# EAGLE board purchase_2021-01-21 (EAGLE 9.6.2)
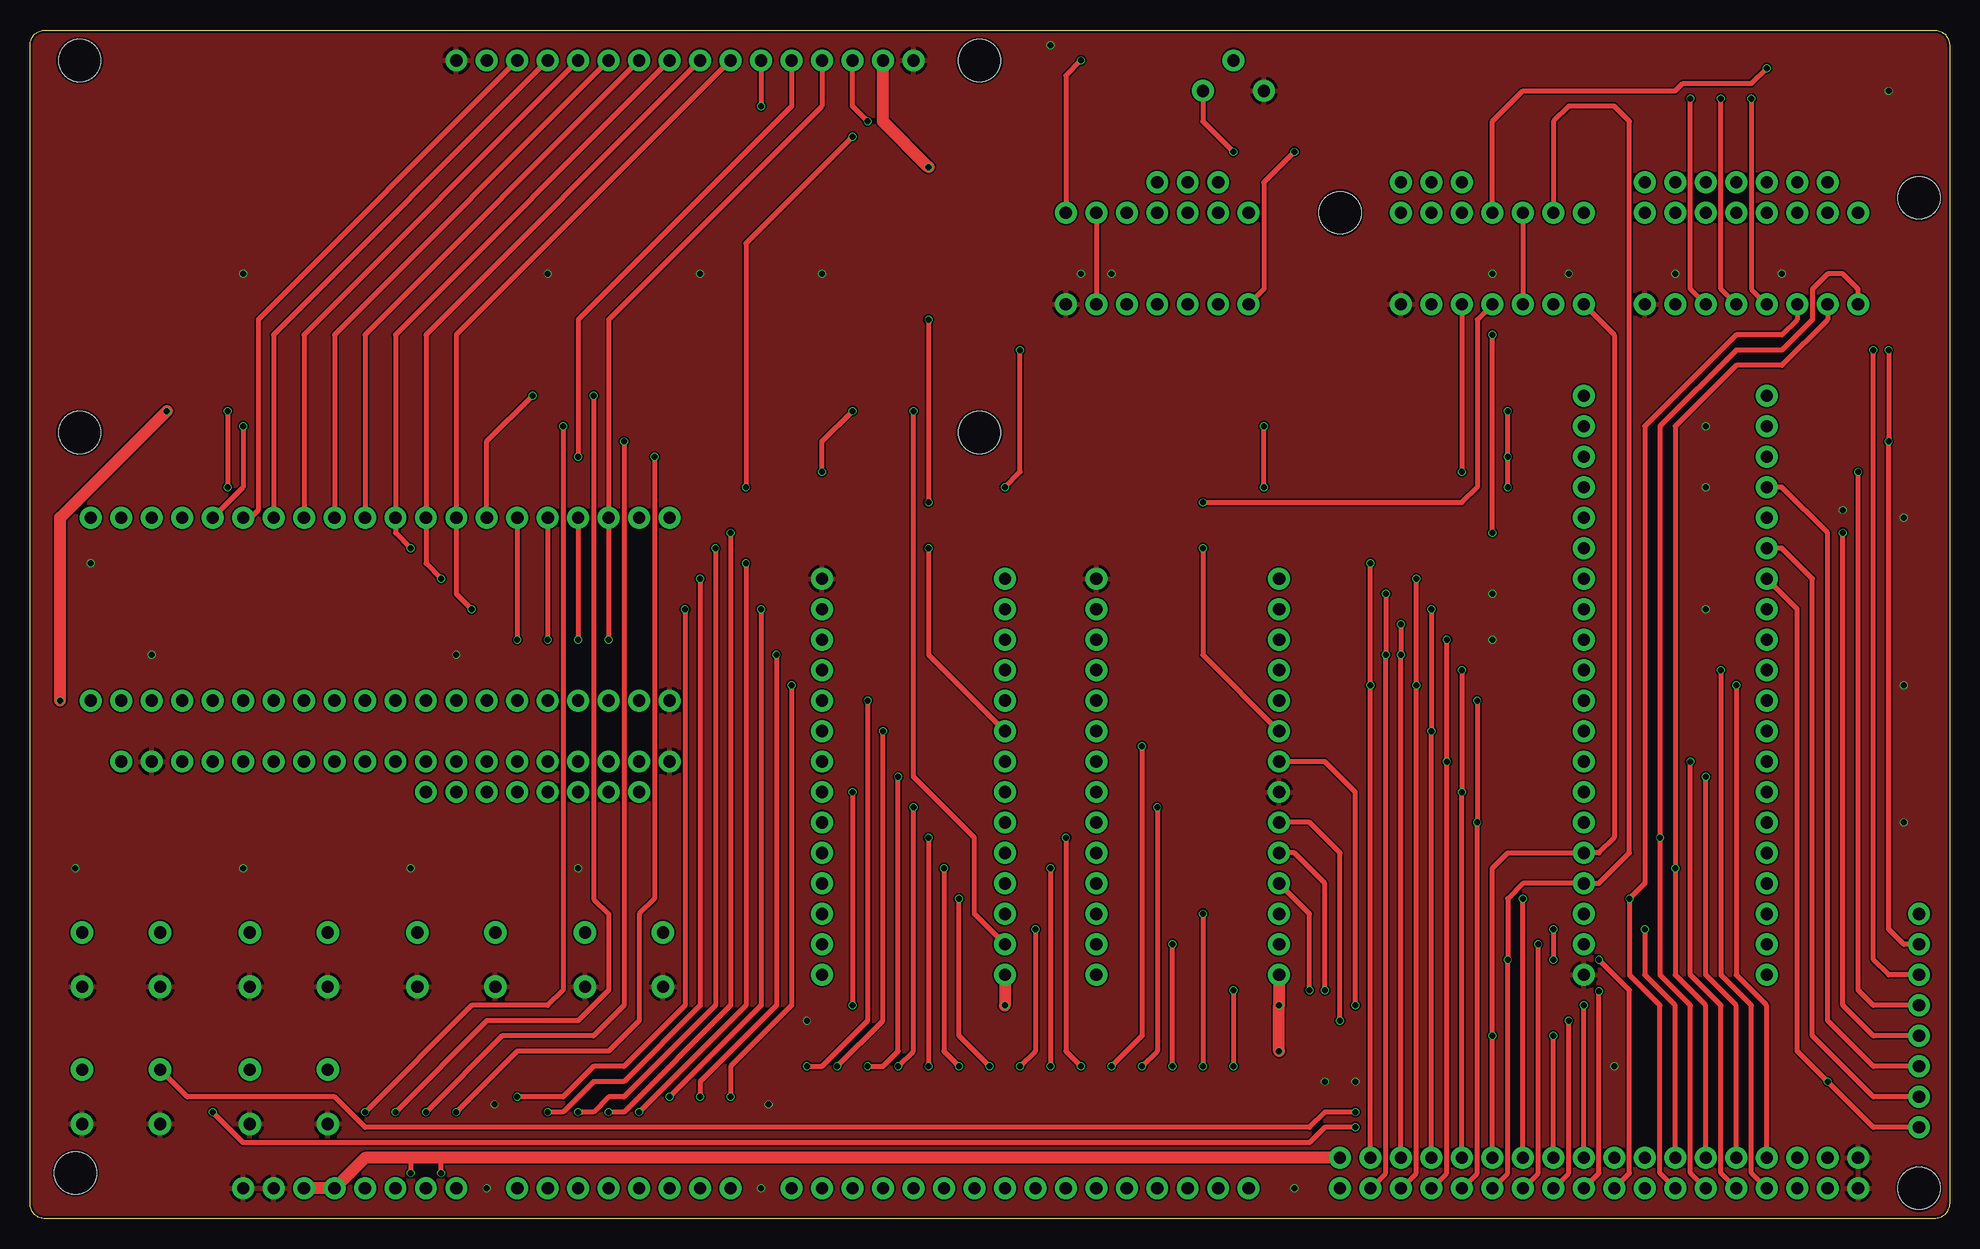
[diagram p0: board, top side]
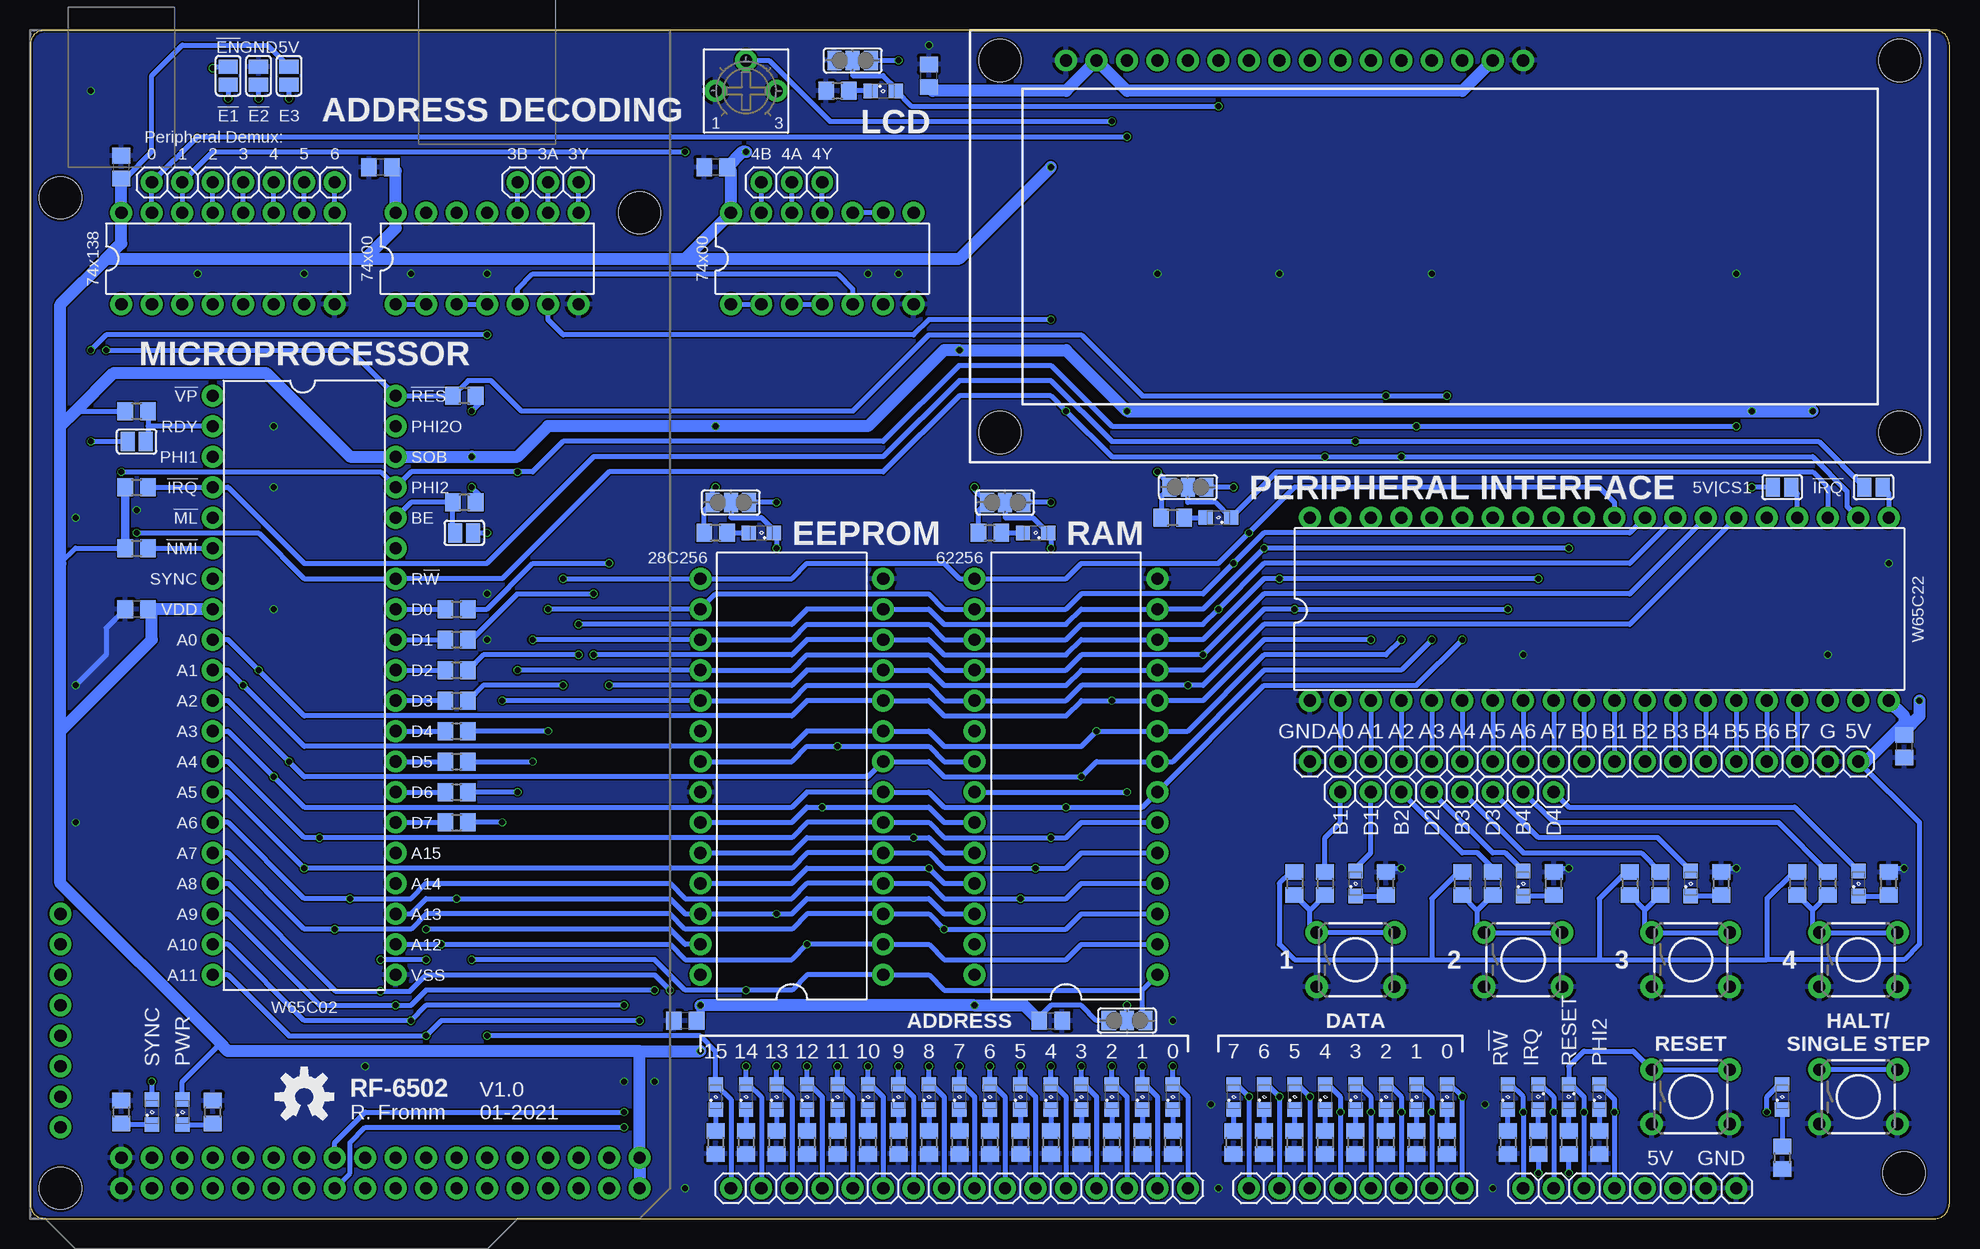
[diagram p1: board, bottom side, seen from below]

Size 160 x 99.06 mm. Coordinates in mm from the lower left corner, seen from the top.
Outline: 0,1.27 0,97.79 arc-90 1.27,99.06 158.73,99.06 arc-90 160,97.79 160,1.27 arc-90 158.73,0 1.27,0 arc-90 0,1.27
Copper layers (1*16): Top 0.035mm / dielectric 1.6mm / Bottom 0.035mm
Design rules "jlcpcb-2layers *": minimum track width 5mil, minimum drill 0.3mm, track to track 5mil, track to pad 5mil, pad to pad 5mil, via to via 5mil, smd to smd 5mil, copper to edge 0.2mm, drill to drill 6mil, minimum pad ring 10mil, minimum via ring 3mil, stop-mask expansion 4mil, vias tented up to drill 0.5mm, thermal gap 10mil
Holes 3.5 mm at 3.79,3.81

## Footprints (pad centres in the part's own frame; a part is rotated, then mirrored left to right if it is on the bottom)
C0805 = smd 1.3 x 1.5: 1 -0.95,0; 2 0.95,0
SJ = smd 1.168 x 1.6: 1 -0.762,0; 2 0.762,0
SML0805 = smd 1.2 x 1.2: A 1.05,0; C -1.05,0
ARDUINO_MEGA_PINS = drill 1.016 pad 1.778: 5V@1 44.45,24.13; 5V@2 46.99,24.13; 22 44.45,21.59; 23 46.99,21.59; 24 44.45,19.05; 25 46.99,19.05; 26 44.45,16.51; 27 46.99,16.51; 28 44.45,13.97; 29 46.99,13.97; 30 44.45,11.43; 31 46.99,11.43; 32 44.45,8.89; 33 46.99,8.89; 34 44.45,6.35; 35 46.99,6.35; 36 44.45,3.81; 37 46.99,3.81; 38 44.45,1.27; 39 46.99,1.27; 40 44.45,-1.27; 41 46.99,-1.27; 42 44.45,-3.81; 43 46.99,-3.81; 44 44.45,-6.35; 45 46.99,-6.35; 46 44.45,-8.89; 47 46.99,-8.89; 48 44.45,-11.43; 49 46.99,-11.43; 50 44.45,-13.97; 51 46.99,-13.97; 52 44.45,-16.51; 53 46.99,-16.51; A8 24.13,-24.13; A9 26.67,-24.13; A10 29.21,-24.13; A11 31.75,-24.13; A12 34.29,-24.13; A13 36.83,-24.13; A14 39.37,-24.13; A15 41.91,-24.13; GND@2 44.45,-19.05; GND@3 46.99,-19.05 | hole 3.5: -34.29,24.13; -35.56,-24.13; 46.99,-24.13
LCD-16X2 = drill 1.016 pad 1.778: 1 0,0; 2 2.54,0; 3 5.08,0; 4 7.62,0; 5 10.16,0; 6 12.7,0; 7 15.24,0; 8 17.78,0; 9 20.32,0; 10 22.86,0; 11 25.4,0; 12 27.94,0; 13 30.48,0; 14 33.02,0; 15 35.56,0; 16 38.1,0 | hole 3.5: -5.5,0; -5.5,-31; 69.5,0; 69.5,-31
R0805 = smd 1.3 x 1.5: 1 -0.95,0; 2 0.95,0
3362P = drill 1.016 pad 1.778: 1 -2.54,0; 2 0,2.54; 3 2.54,0
SJ_2 = smd 1.168 x 1.6: 1 -1.524,0; 2 0,0; 3 1.524,0
DIL40 = drill 1.016 pad 1.778: 1 -24.13,-7.62; 2 -21.59,-7.62; 3 -19.05,-7.62; 4 -16.51,-7.62; 5 -13.97,-7.62; 6 -11.43,-7.62; 7 -8.89,-7.62; 8 -6.35,-7.62; 9 -3.81,-7.62; 10 -1.27,-7.62; 11 1.27,-7.62; 12 3.81,-7.62; 13 6.35,-7.62; 14 8.89,-7.62; 15 11.43,-7.62; 16 13.97,-7.62; 17 16.51,-7.62; 18 19.05,-7.62; 19 21.59,-7.62; 20 24.13,-7.62; 21 24.13,7.62; 22 21.59,7.62; 23 19.05,7.62; 24 16.51,7.62; 25 13.97,7.62; 26 11.43,7.62; 27 8.89,7.62; 28 6.35,7.62; 29 3.81,7.62; 30 1.27,7.62; 31 -1.27,7.62; 32 -3.81,7.62; 33 -6.35,7.62; 34 -8.89,7.62; 35 -11.43,7.62; 36 -13.97,7.62; 37 -16.51,7.62; 38 -19.05,7.62; 39 -21.59,7.62; 40 -24.13,7.62
DIL28-6 = drill 1.016 pad 1.778: 1 -16.51,-7.62; 2 -13.97,-7.62; 3 -11.43,-7.62; 4 -8.89,-7.62; 5 -6.35,-7.62; 6 -3.81,-7.62; 7 -1.27,-7.62; 8 1.27,-7.62; 9 3.81,-7.62; 10 6.35,-7.62; 11 8.89,-7.62; 12 11.43,-7.62; 13 13.97,-7.62; 14 16.51,-7.62; 15 16.51,7.62; 16 13.97,7.62; 17 11.43,7.62; 18 8.89,7.62; 19 6.35,7.62; 20 3.81,7.62; 21 1.27,7.62; 22 -1.27,7.62; 23 -3.81,7.62; 24 -6.35,7.62; 25 -8.89,7.62; 26 -11.43,7.62; 27 -13.97,7.62; 28 -16.51,7.62
DIL14 = drill 1.016 pad 1.778: 1 -7.62,-3.81; 2 -5.08,-3.81; 3 -2.54,-3.81; 4 0,-3.81; 5 2.54,-3.81; 6 5.08,-3.81; 7 7.62,-3.81; 8 7.62,3.81; 9 5.08,3.81; 10 2.54,3.81; 11 0,3.81; 12 -2.54,3.81; 13 -5.08,3.81; 14 -7.62,3.81
DIL16 = drill 1.016 pad 1.778: 1 -8.89,-3.81; 2 -6.35,-3.81; 3 -3.81,-3.81; 4 -1.27,-3.81; 5 1.27,-3.81; 6 3.81,-3.81; 7 6.35,-3.81; 8 8.89,-3.81; 9 8.89,3.81; 10 6.35,3.81; 11 3.81,3.81; 12 1.27,3.81; 13 -1.27,3.81; 14 -3.81,3.81; 15 -6.35,3.81; 16 -8.89,3.81
1X08 = drill 1.016 pad 1.778: 1 -8.89,0; 2 -6.35,0; 3 -3.81,0; 4 -1.27,0; 5 1.27,0; 6 3.81,0; 7 6.35,0; 8 8.89,0
1X07 = drill 1.016 pad 1.778: 1 -7.62,0; 2 -5.08,0; 3 -2.54,0; 4 0,0; 5 2.54,0; 6 5.08,0; 7 7.62,0
1X03 = drill 1.016 pad 1.778: 1 -2.54,0; 2 0,0; 3 2.54,0
TACTILE_SWITCH_PTH_6.0MM = drill 1.016 pad 1.88: 1 -3.251,2.261; 2 3.251,2.261; 3 -3.251,-2.261; 4 3.251,-2.261
1X10 = drill 1.016 pad 1.778: 1 -11.43,0; 2 -8.89,0; 3 -6.35,0; 4 -3.81,0; 5 -1.27,0; 6 1.27,0; 7 3.81,0; 8 6.35,0; 9 8.89,0; 10 11.43,0
1X09 = drill 1.016 pad 1.778: 1 -10.16,0; 2 -7.62,0; 3 -5.08,0; 4 -2.54,0; 5 0,0; 6 2.54,0; 7 5.08,0; 8 7.62,0; 9 10.16,0

## Placement (x,y rotation side)
C1  100n  [C0805]  151.11,50.8 180 bottom
C2  100n  [C0805]  105.39,16.51 180 bottom
C3  100n  [C0805]  74.91,16.51 0 bottom
C4  100n  [C0805]  3.79,39.37 270 bottom
C5  100n  [C0805]  85.07,95.25 90 bottom
C6  100n  [C0805]  130.79,87.63 180 bottom
C7  100n  [C0805]  102.85,87.63 180 bottom
C8  100n  [C0805]  152.38,87.63 90 bottom
JP1  [SJ]  151.11,64.77 0 bottom
JP2  [SJ]  123.81,57.15 180 bottom
JP3  [SJ]  6.33,60.96 180 bottom
JP4  [SJ]  138.41,95.25 270 bottom
JP5  [SJ]  143.49,95.25 270 bottom
JP6  [SJ]  140.95,95.25 270 bottom
JP7  [SJ]  13.95,60.96 180 bottom
LED1  [SML0805]  64.75,10.16 90 bottom
LED2  [SML0805]  67.29,10.16 90 bottom
LED3  [SML0805]  69.83,10.16 90 bottom
LED4  [SML0805]  72.37,10.16 90 bottom
LED5  [SML0805]  74.91,10.16 90 bottom
LED6  [SML0805]  77.45,10.16 90 bottom
LED7  [SML0805]  79.99,10.16 90 bottom
LED8  [SML0805]  82.53,10.16 90 bottom
LED9  [SML0805]  85.07,10.16 90 bottom
LED10  [SML0805]  87.61,10.16 90 bottom
LED11  [SML0805]  90.15,10.16 90 bottom
LED12  [SML0805]  92.69,10.16 90 bottom
LED13  [SML0805]  95.23,10.16 90 bottom
LED14  [SML0805]  97.77,10.16 90 bottom
LED15  [SML0805]  100.31,10.16 90 bottom
LED16  [SML0805]  102.85,10.16 90 bottom
LED17  [SML0805]  41.89,10.16 90 bottom
LED18  [SML0805]  44.43,10.16 90 bottom
LED19  [SML0805]  46.97,10.16 90 bottom
LED20  [SML0805]  49.51,10.16 90 bottom
LED21  [SML0805]  52.05,10.16 90 bottom
LED22  [SML0805]  54.59,10.16 90 bottom
LED23  [SML0805]  57.13,10.16 90 bottom
LED24  [SML0805]  59.67,10.16 90 bottom
LED25  [SML0805]  36.81,10.16 90 bottom
LED26  [SML0805]  149.84,8.89 90 bottom
LED27  [SML0805]  34.27,10.16 270 bottom
LED28  [SML0805]  99.04,57.15 180 bottom
LED29  [SML0805]  76.18,57.15 180 bottom
LED30  [SML0805]  60.94,58.42 180 bottom
LED31  [SML0805]  88.88,93.98 0 bottom
LED32  [SML0805]  31.73,10.16 270 bottom
LED33  [SML0805]  29.19,10.16 90 bottom
LED34  [SML0805]  13.95,10.16 90 bottom
LED35  [SML0805]  49.51,27.94 90 bottom
LED36  [SML0805]  35.54,27.94 90 bottom
LED37  [SML0805]  21.57,27.94 90 bottom
LED38  [SML0805]  7.6,27.94 90 bottom
LED39  [SML0805]  147.3,8.89 90 bottom
LOGO1  OSHW-LOGOM  [OSHW-LOGO-M]  137.14,10.16 0 bottom
M1  ARDUINO_MEGA_PINS  [ARDUINO_MEGA_PINS]  133.33,49.53 270 bottom
M2  LCD-16X2  [LCD-16X2]  73.64,96.52 0 bottom
R1  10k  [R0805]  151.11,67.31 0 bottom
R2  10k  [R0805]  151.11,60.96 0 bottom
R3  10k  [R0805]  151.11,55.88 0 bottom
R4  10k  [R0805]  123.81,68.58 180 bottom
R5  10k  [R0805]  123.81,59.69 180 bottom
R6  1k  [R0805]  124.44,50.8 0 bottom
R7  1k  [R0805]  124.44,48.26 0 bottom
R8  1k  [R0805]  124.44,45.72 0 bottom
R9  1k  [R0805]  124.44,43.18 0 bottom
R10  1k  [R0805]  124.44,40.64 0 bottom
R11  1k  [R0805]  124.44,38.1 0 bottom
R12  1k  [R0805]  124.44,35.56 0 bottom
R13  1k  [R0805]  124.44,33.02 0 bottom
R14  1k  [R0805]  102.85,57.15 180 bottom
R15  1k  [R0805]  79.99,57.15 180 bottom
R16  1k  [R0805]  64.75,58.42 180 bottom
R17  1k  [R0805]  92.69,93.98 180 bottom
R18  1k  [R0805]  31.73,6.35 270 bottom
R19  1k  [R0805]  29.19,6.35 270 bottom
R20  1k  [R0805]  13.95,5.08 270 bottom
R21  1k  [R0805]  64.75,6.35 270 bottom
R22  1k  [R0805]  67.29,6.35 270 bottom
R23  1k  [R0805]  69.83,6.35 270 bottom
R24  1k  [R0805]  72.37,6.35 270 bottom
R25  1k  [R0805]  74.91,6.35 270 bottom
R26  1k  [R0805]  77.45,6.35 270 bottom
R27  1k  [R0805]  79.99,6.35 270 bottom
R28  1k  [R0805]  82.53,6.35 270 bottom
R29  1k  [R0805]  85.07,6.35 270 bottom
R30  1k  [R0805]  87.61,6.35 270 bottom
R31  1k  [R0805]  90.15,6.35 270 bottom
R32  1k  [R0805]  92.69,6.35 270 bottom
R33  1k  [R0805]  95.23,6.35 270 bottom
R34  1k  [R0805]  97.77,6.35 270 bottom
R35  1k  [R0805]  100.31,6.35 270 bottom
R36  1k  [R0805]  102.85,6.35 270 bottom
R37  1k  [R0805]  41.89,6.35 270 bottom
R38  1k  [R0805]  44.43,6.35 270 bottom
R39  1k  [R0805]  46.97,6.35 270 bottom
R40  1k  [R0805]  49.51,6.35 270 bottom
R41  1k  [R0805]  52.05,6.35 270 bottom
R42  1k  [R0805]  54.59,6.35 270 bottom
R43  1k  [R0805]  57.13,6.35 270 bottom
R44  1k  [R0805]  59.67,6.35 270 bottom
R45  1k  [R0805]  36.81,6.35 270 bottom
R46  1k  [R0805]  152.38,8.89 90 bottom
R47  1k  [R0805]  34.27,6.35 270 bottom
R48  10k  [R0805]  54.59,27.94 270 bottom
R49  10k  [R0805]  40.62,27.94 270 bottom
R50  1k  [R0805]  38.08,27.94 270 bottom
R51  1k  [R0805]  33,27.94 90 bottom
R52  1k  [R0805]  52.05,27.94 270 bottom
R53  1k  [R0805]  46.97,27.94 90 bottom
R54  10k  [R0805]  26.65,27.94 270 bottom
R55  1k  [R0805]  24.11,27.94 270 bottom
R56  1k  [R0805]  19.03,27.94 90 bottom
R57  10k  [R0805]  12.68,27.94 270 bottom
R58  1k  [R0805]  10.14,27.94 270 bottom
R59  1k  [R0805]  5.06,27.94 90 bottom
R60  1k  [R0805]  144.76,8.89 90 bottom
R61  [3362P]  100.31,93.98 0 bottom
SJ1  [SJ_2]  68.56,16.51 180 bottom
SJ2  [SJ_2]  101.58,59.69 0 bottom
SJ3  [SJ_2]  63.48,60.96 0 bottom
SJ4  [SJ_2]  78.72,59.69 0 bottom
SJ7  [SJ_2]  91.42,96.52 0 bottom
U1  W65C02S6TP  [DIL40]  137.14,44.45 270 bottom
U2  28C256  [DIL28-6]  96.5,36.83 90 bottom
U3  62256  [DIL28-6]  73.64,36.83 90 bottom
U4  W65C22S6TP  [DIL40]  29.19,50.8 0 bottom
U5  74HC00N  [DIL14]  121.9,80.01 0 bottom
U6  74138N  [DIL16]  143.49,80.01 0 bottom
U7  74HC00N  [DIL14]  93.96,80.01 0 bottom
X1  [1X08]  72.37,2.54 180 bottom
X3  [1X07]  142.22,86.36 0 bottom
X4  [1X03]  96.5,86.36 180 bottom
X5  [1X08]  26.65,2.54 0 bottom
X6  TACT_SWITCH  [TACTILE_SWITCH_PTH_6.0MM]  21.57,10.16 0 bottom
X7  TACT_SWITCH  [TACTILE_SWITCH_PTH_6.0MM]  7.6,10.16 0 bottom
X8  [1X10]  19.03,38.1 0 bottom
X9  [1X08]  92.69,2.54 180 bottom
X10  [1X08]  49.51,2.54 180 bottom
X11  [1X09]  43.16,38.1 0 bottom
X12  [1X08]  41.89,35.56 180 bottom
X13  TACT_SWITCH  [TACTILE_SWITCH_PTH_6.0MM]  49.51,21.59 0 bottom
X14  TACT_SWITCH  [TACTILE_SWITCH_PTH_6.0MM]  35.54,21.59 0 bottom
X15  TACT_SWITCH  [TACTILE_SWITCH_PTH_6.0MM]  21.57,21.59 0 bottom
X16  TACT_SWITCH  [TACTILE_SWITCH_PTH_6.0MM]  7.6,21.59 0 bottom
X17  [1X03]  116.82,86.36 0 bottom

## Library data of the parts
C1-C8 = rcl; SPICEPREFIX: C
JP1-JP7 M1 M2 R61 SJ1-SJ4 SJ7 U1-U7 X1 X3-X17 = 6502_lib
LED1-LED39 = led
LOGO1 = SparkFun-Aesthetics
R1-R60 = rcl; SPICEPREFIX: R

## Nets
+5V: C1.1 C2.1 C3.1 C4.1 C5.1 C6.1 C7.1 C8.1 JP4.1 JP7.2 LED39.A M1.5V@1 M1.5V@2 M2.2 M2.15 R1.1 R2.1 R3.1 R4.1 R5.1 R14.2 R15.2 R16.2 R18.2 R47.2 R48.1 R49.1 R54.1 R57.1 R61.3 SJ1.3 SJ2.1 SJ3.1 SJ4.1 U1.8 U1.38 U2.28 U3.28 U4.20 U5.14 U6.16 U7.14 X5.5 X5.6 X8.10
A0: LED1.A M1.49 M2.4 U1.9 U2.10 U3.10 U4.38 X1.1
A1: LED2.A M1.48 U1.10 U2.9 U3.9 U4.37 X1.2
A2: LED3.A M1.47 U1.11 U2.8 U3.8 U4.36 X1.3
A3: LED4.A M1.46 U1.12 U2.7 U3.7 U4.35 X1.4
A4: LED5.A M1.45 U1.13 U2.6 U3.6 U6.1 X1.5
A5: LED6.A M1.44 U1.14 U2.5 U3.5 U6.2 X1.6
A6: LED7.A M1.43 U1.15 U2.4 U3.4 U6.3 X1.7
A7: LED8.A M1.42 U1.16 U2.3 U3.3 X1.8
A8: LED9.A M1.37 U1.17 U2.25 U3.25 X9.1
A9: LED10.A M1.36 U1.18 U2.24 U3.24 X9.2
A10: LED11.A M1.35 U1.19 U2.21 U3.21 X9.3
A11: LED12.A M1.34 U1.20 U2.23 U3.23 X9.4
A12: LED13.A M1.33 U1.22 U2.2 U3.2 X9.5
A13: LED14.A M1.32 U1.23 U2.26 U3.26 X9.6
A14: LED15.A M1.31 SJ1.1 U1.24 U2.1 U3.1 U5.13 X9.7
A15: LED16.A M1.30 U1.25 U5.1 U5.2 X9.8
BE: JP2.2 R5.2 U1.36
BTN1: R52.1 X12.8
BTN2: R50.1 X12.6
BTN3: R55.1 X12.4
BTN4: R58.1 X12.2
D0: LED17.A M1.22 M2.7 R6.2 U2.11 U3.11 U4.33 X10.1
D1: LED18.A M1.23 M2.8 R7.2 U2.12 U3.12 U4.32 X10.2
D2: LED19.A M1.24 M2.9 R8.2 U2.13 U3.13 U4.31 X10.3
D3: LED20.A M1.25 M2.10 R9.2 U2.15 U3.15 U4.30 X10.4
D4: LED21.A M1.26 M2.11 R10.2 U2.16 U3.16 U4.29 X10.5
D5: LED22.A M1.27 M2.12 R11.2 U2.17 U3.17 U4.28 X10.6
D6: LED23.A M1.28 M2.13 R12.2 U2.18 U3.18 U4.27 X10.7
D7: LED24.A M1.29 M2.14 R13.2 U2.19 U3.19 U4.26 X10.8
EEPROM_!CS: LED28.C SJ2.2 U2.20
EEPROM_!WE: M1.39 U2.27
GND: C1.2 C2.2 C3.2 C4.2 C5.2 C6.2 C7.2 C8.2 JP6.1 M1.GND@2 M1.GND@3 M2.1 M2.16 R17.2 R19.2 R20.2 R21.2 R22.2 R23.2 R24.2 R25.2 R26.2 R27.2 R28.2 R29.2 R30.2 R31.2 R32.2 R33.2 R34.2 R35.2 R36.2 R37.2 R38.2 R39.2 R40.2 R41.2 R42.2 R43.2 R44.2 R45.2 R46.2 R51.2 R53.2 R56.2 R59.2 R60.2 R61.1 SJ7.1 U1.21 U2.14 U2.22 U3.14 U4.1 U5.7 U6.8 U7.7 X5.7 X5.8 X6.3 X6.4 X7.3 X7.4 X8.9 X11.1 X13.3 X13.4 X14.3 X14.4 X15.3 X15.4 X16.3 X16.4
HALT_BTN: M1.40 X7.1 X7.2
HALT_LED: LED34.A M1.41
IRQB: JP3.2 LED27.C M1.A13 R2.2 U1.4 X5.2
LCD_CS: LED31.A M2.6 SJ7.2
N$1: R6.1 U1.33
N$2: R7.1 U1.32
N$3: R8.1 U1.31
N$4: R9.1 U1.30
N$5: R10.1 U1.29
N$6: R11.1 U1.28
N$7: R12.1 U1.27
N$8: R13.1 U1.26
N$9: U5.8 X17.3
N$10: U5.9 X17.2
N$11: SJ1.2 U3.22
N$12: SJ2.3 U5.3 U5.4 U5.12
N$13: SJ4.3 U5.6
N$14: SJ3.3 U6.15 X3.1
N$15: JP4.2 U6.6
N$16: JP5.1 U5.11
N$17: JP6.2 U6.5
N$18: U6.14 U7.1 U7.2 X3.2
N$19: U7.3 U7.4
N$20: U7.6 U7.9 U7.10
N$21: SJ7.3 U7.8
N$22: LED1.C R21.1
N$23: LED2.C R22.1
N$24: LED3.C R23.1
N$25: LED4.C R24.1
N$26: LED5.C R25.1
N$27: LED6.C R26.1
N$28: LED7.C R27.1
N$29: LED8.C R28.1
N$30: LED9.C R29.1
N$31: LED10.C R30.1
N$32: LED11.C R31.1
N$33: LED12.C R32.1
N$34: LED13.C R33.1
N$35: LED14.C R34.1
N$36: LED15.C R35.1
N$37: LED16.C R36.1
N$38: LED17.C R37.1
N$39: LED18.C R38.1
N$40: LED19.C R39.1
N$41: LED20.C R40.1
N$42: LED21.C R41.1
N$43: LED22.C R42.1
N$44: LED23.C R43.1
N$45: LED24.C R44.1
N$46: LED25.C R45.1
N$47: LED26.C R46.1
N$48: LED27.A R47.1
N$49: LED28.A R14.1
N$50: LED29.A R15.1
N$51: LED30.A R16.1
N$52: U5.10 X17.1
N$53: JP5.2 U6.4
N$54: LED39.C R60.1
N$55: JP3.1 U4.21
N$56: U6.12 X3.4
N$57: U6.11 X3.5
N$58: U6.13 X3.3
N$59: U6.10 X3.6
N$60: U6.9 X3.7
N$61: LED31.C R17.1
N$62: U7.11 X4.1
N$63: U7.12 X4.2
N$64: U7.13 X4.3
N$65: LED32.A R18.1
N$66: LED33.C R19.1
N$67: LED34.C R20.1
N$68: U4.2 X11.2
N$69: U4.3 X11.3
N$70: U4.4 X11.4
N$71: U4.5 X11.5
N$72: U4.6 X11.6
N$73: U4.7 X11.7
N$74: U4.8 X11.8
N$75: U4.9 X11.9
N$76: U4.10 X8.1
N$77: U4.11 X8.2
N$78: U4.12 X8.3
N$79: U4.13 X8.4
N$80: U4.14 X8.5
N$81: U4.15 X8.6
N$82: U4.16 X8.7
N$83: U4.17 X8.8
N$84: R48.2 R52.2 X13.1 X13.2
N$85: LED35.C R53.1
N$86: R49.2 R50.2 X14.1 X14.2
N$87: LED36.C R51.1
N$88: R54.2 R55.2 X15.1 X15.2
N$89: LED37.C R56.1
N$90: R57.2 R58.2 X16.1 X16.2
N$91: JP7.1 U4.24
N$92: M2.3 R61.2
N$95: LED38.C R59.1
NMIB: M1.A14 R3.2 U1.6
PHI2: LED33.A M1.A11 U1.37 U4.25 U5.5 U7.5 X5.4
PIA_!CS: LED30.C SJ3.2 U4.23
RAM_!CS: LED29.C SJ4.2 U3.20
RDY: JP1.2 R1.2 U1.2
RDY_BE: JP1.1 JP2.1 M1.A9
RESB: LED32.C M1.A10 R4.2 U1.40 U4.34 X5.3 X6.1 X6.2
RWB: LED25.A M1.A12 M2.5 U1.34 U3.27 U4.22 X5.1
SYNC: LED26.A M1.A15 U1.7
ULED1: LED35.A X12.7
ULED2: LED36.A X12.5
ULED3: LED37.A X12.3
ULED4: LED38.A X12.1

## Tracks (layer width: path | path; a pad name or v marks a point on that pad's centre or on a via)
+5V  (via drill 0.5)
  Top 0.4: v81.26,60.96 82.53,62.23 v82.53,72.39 | v66.02,62.23 66.02,64.77 v68.56,67.31 | v102.85,60.96 v102.85,66.04 | v123.17,60.96 v123.17,63.5 v123.17,67.31 | v34.27,3.81 34.27,5.08 | 31.73,5.08 v31.73,3.81 | R61.3 97.77,91.44 v100.31,88.9 | v16.49,67.31 16.47,67.29 v16.47,60.96
  Top 0.7: M1.5V@1 34.27,5.08 31.73,5.08 27.92,5.08
  Top 1: v2.52,43.18 2.52,58.42 v11.41,67.31 | U2.28 v104.12,17.78 v104.12,13.97 | U3.28 v81.26,17.78 | v74.91,87.63 71.1,91.44 M2.2 | X5.6 X5.5 27.92,5.08 M1.5V@1
  Bottom 0.4: C3.1 75.86,16.83 74.91,17.78 72.37,17.78 71.1,16.51 SJ1.3 | R14.2 103.8,58.99 SJ2.1 103.1,60.71 v102.85,60.96 | R15.2 80.94,58.99 SJ4.1 81.26,60.71 v81.26,60.96 | v66.02,62.23 65,61.21 SJ3.1 65.7,60.26 R16.2 | 157.46,54.61 156.19,55.88 R3.1 | 156.19,67.31 R1.1 | C8.1 152.06,86.68 149.84,88.9 149.84,95.25 147.3,97.79 140.19,97.79 JP4.1 | v123.17,67.31 122.54,67.94 122.54,68.26 | v123.17,60.96 122.54,60.33 122.54,60.01 R5.1 | R47.2 v34.27,3.81 | v31.73,3.81 R18.2 | R48.1 54.91,28.89 55.86,27.94 55.86,22.86 54.59,21.59 43.16,21.59 | 43.16,21.59 29.19,21.59 | R49.1 40.94,28.89 43.16,26.67 43.16,21.59 | R54.1 26.97,28.89 29.19,26.67 29.19,21.59 | R57.1 13,28.89 15.22,26.67 15.22,21.59 | 29.19,21.59 15.22,21.59 | X8.10 2.52,33.02 2.52,22.86 3.79,21.59 15.22,21.59 | LED39.A 147.3,11.43 144.12,14.61 | JP7.2 v16.47,60.96
  Bottom 0.7: R4.1 122.54,68.26 | 149.84,50.48 C1.1 | R3.1 R2.1 | 129.52,87.31 C6.1 | 84.75,93.98 C5.1 | 3.79,41.27 3.79,40.64 C4.1 | 101.58,87.31 C7.1 | v104.12,17.78 104.12,16.83 C2.1
  Bottom 1: M2.15 40.62,93.98 68.56,93.98 M2.2 73.64,93.98 84.75,93.98 | v104.12,17.78 v81.26,17.78 77.13,17.78 C3.1 | 157.46,40.64 157.46,27.94 144.12,14.61 143.49,13.97 109.2,13.97 | 157.46,40.64 149.84,48.26 149.84,50.48 | U1.8 C1.1 | 157.46,40.64 157.46,54.61 157.46,66.04 | 157.46,66.04 156.19,67.31 153.01,70.48 140.31,70.48 133.33,63.5 U1.38 v123.17,63.5 119.36,63.5 116.82,66.04 v102.85,66.04 90.15,66.04 83.8,72.39 v82.53,72.39 73.64,72.39 v68.56,67.31 v16.49,67.31 v11.41,67.31 | 157.46,66.04 157.46,76.2 153.65,80.01 | 153.65,80.01 152.38,81.28 U6.16 C8.1 | 153.65,80.01 132.06,80.01 | 132.06,80.01 129.52,82.55 U5.14 129.52,87.31 | 132.06,80.01 105.39,80.01 | 105.39,80.01 U7.14 101.58,87.31 | v2.52,43.18 2.52,41.91 3.79,40.64 | U4.20 3.79,41.91 C4.1 | C7.1 100.63,88.9 v100.31,88.9 | 3.79,41.27 6.97,38.1 X8.10 | M1.5V@2 M1.5V@1 109.2,13.97 | v74.91,87.63 82.53,80.01 105.39,80.01 | 109.2,13.97 v104.12,13.97
A0  (via drill 0.5)
  Top 0.4: v48.24,48.26 U4.38 48.24,74.93 66.02,92.71 M2.4 | v64.75,12.7 66.02,12.7 69.83,16.51 v69.83,43.18 | M1.49 143.49,3.81 143.49,17.78 140.95,20.32 v140.95,45.72
  Bottom 0.4: U1.9 143.49,48.26 v140.95,45.72 137.14,41.91 96.5,41.91 95.23,43.18 U2.10 85.07,43.18 83.8,41.91 73.64,41.91 72.37,43.18 v69.83,43.18 U3.10 62.21,43.18 57.13,48.26 v48.24,48.26 | v64.75,12.7 LED1.A 64.53,11.21 63.48,10.16 X1.1
A1  (via drill 0.5)
  Top 0.4: U4.37 v45.7,48.26 | v67.29,12.7 71.1,16.51 v71.1,40.64 | M1.48 144.76,17.78 142.22,20.32 v142.22,44.45
  Bottom 0.4: U1.10 143.49,45.72 v142.22,44.45 137.14,39.37 96.5,39.37 95.23,40.64 U2.9 85.07,40.64 83.8,39.37 72.37,39.37 v71.1,40.64 U3.9 63.48,40.64 57.13,46.99 46.97,46.99 v45.7,48.26 | v67.29,12.7 LED2.A 67.07,11.21 66.02,10.16 X1.2
A2  (via drill 0.5)
  Top 0.4: U4.36 v43.16,48.26 | v69.83,12.7 71.1,12.7 72.37,13.97 v72.37,36.83 | M1.47 140.95,3.81 140.95,17.78 138.41,20.32 v138.41,38.1
  Bottom 0.4: U1.11 143.49,43.18 v138.41,38.1 137.14,36.83 90.15,36.83 U2.8 85.07,38.1 83.8,36.83 v72.37,36.83 71.1,38.1 U3.8 64.75,38.1 57.13,45.72 45.7,45.72 v43.16,48.26 | v69.83,12.7 LED3.A 69.61,11.21 68.56,10.16 X1.3
A3  (via drill 0.5)
  Top 0.4: U4.35 v40.62,48.26 | v72.37,12.7 73.64,13.97 v73.64,34.29 | M1.46 142.22,17.78 139.68,20.32 v139.68,36.83
  Bottom 0.4: U1.12 143.49,40.64 v139.68,36.83 137.14,34.29 96.5,34.29 95.23,35.56 U2.7 85.07,35.56 83.8,34.29 v73.64,34.29 67.29,34.29 U3.7 57.13,44.45 44.43,44.45 v40.62,48.26 | v72.37,12.7 LED4.A 72.15,11.21 71.1,10.16 X1.4
A4  (via drill 0.5)
  Top 0.4: v74.91,31.75 v74.91,12.7 | M1.45 138.41,3.81 138.41,17.78 135.87,20.32 v135.87,31.75 135.87,66.04 142.22,72.39 146.03,72.39 148.57,74.93 148.57,77.47 149.84,78.74 151.11,78.74 152.38,77.47 U6.1
  Bottom 0.4: U1.13 143.49,38.1 137.14,31.75 v135.87,31.75 96.5,31.75 95.23,33.02 U2.6 85.07,33.02 83.8,31.75 v74.91,31.75 73.64,31.75 72.37,33.02 U3.6 | v74.91,12.7 LED5.A 74.69,11.21 73.64,10.16 X1.5
A5  (via drill 0.5)
  Top 0.4: v76.18,29.21 76.18,13.97 v77.45,12.7 | M1.44 139.68,17.78 137.14,20.32 v137.14,29.21 137.14,66.04 142.22,71.12 146.03,71.12 149.84,74.93 U6.2
  Bottom 0.4: U1.14 143.49,35.56 v137.14,29.21 96.5,29.21 95.23,30.48 U2.5 85.07,30.48 83.8,29.21 v76.18,29.21 73.64,29.21 72.37,30.48 U3.5 | v77.45,12.7 LED6.A 77.23,11.21 76.18,10.16 X1.6
A6  (via drill 0.5)
  Top 0.4: v79.99,12.7 77.45,15.24 v77.45,26.67 | M1.43 135.87,3.81 135.87,17.78 133.33,20.32 v133.33,26.67 134.6,27.94 134.6,66.04 142.22,73.66 146.03,73.66 147.3,74.93 U6.3
  Bottom 0.4: U1.15 143.49,33.02 137.14,26.67 v133.33,26.67 128.25,26.67 126.98,27.94 106.66,27.94 105.39,26.67 96.5,26.67 95.23,27.94 U2.4 85.07,27.94 83.8,26.67 v77.45,26.67 73.64,26.67 72.37,27.94 U3.4 | v79.99,12.7 LED7.A 79.77,11.21 78.72,10.16 X1.7
A7  (via drill 0.5)
  Top 0.4: v82.53,12.7 83.8,13.97 v83.8,24.13 | M1.42 137.14,17.78 134.6,20.32 v134.6,24.13
  Bottom 0.4: U1.16 143.49,30.48 137.14,24.13 v134.6,24.13 128.25,24.13 126.98,25.4 106.66,25.4 105.39,24.13 96.5,24.13 95.23,25.4 U2.3 85.07,25.4 v83.8,24.13 73.64,24.13 72.37,25.4 U3.3 | v82.53,12.7 LED8.A 82.31,11.21 81.26,10.16 X1.8
A8  (via drill 0.5)
  Top 0.4: M1.37 130.79,3.81 v130.79,18.95 | v106.66,19.05 106.66,25.4 U2.25 | v85.07,29.21 v85.07,12.7
  Bottom 0.4: U1.17 143.49,27.94 134.5,18.95 v130.79,18.95 128.35,18.95 126.98,20.32 107.93,20.32 v106.66,19.05 | U2.25 96.5,27.94 95.23,29.21 v85.07,29.21 83.8,27.94 U3.25 | v85.07,12.7 LED9.A 84.85,11.21 83.8,10.16 X9.1
A9  (via drill 0.5)
  Top 0.4: M1.36 v129.52,17.78 | v107.93,19.05 107.93,27.94 105.39,30.48 U2.24 | v86.34,31.75 86.34,13.97 v87.61,12.7
  Bottom 0.4: v107.93,19.05 126.98,19.05 128.25,17.78 v129.52,17.78 135.87,17.78 143.49,25.4 U1.18 | U2.24 96.5,30.48 95.23,31.75 v86.34,31.75 85.07,31.75 83.8,30.48 U3.24 | v87.61,12.7 LED10.A 87.39,11.21 86.34,10.16 X9.2
A10  (via drill 0.5)
  Top 0.4: M1.35 128.25,3.81 v128.25,16.51 | v110.47,17.78 110.47,35.56 107.93,38.1 U2.21 | v90.15,12.7 92.69,15.24 v92.69,39.37
  Bottom 0.4: v110.47,17.78 126.98,17.78 v128.25,16.51 137.14,16.51 143.49,22.86 U1.19 | U2.21 96.5,38.1 95.23,39.37 v92.69,39.37 85.07,39.37 83.8,38.1 U3.21 | v90.15,12.7 LED11.A 89.93,11.21 88.88,10.16 X9.3
A11  (via drill 0.5)
  Top 0.4: M1.34 v126.98,15.24 | v109.2,16.51 109.2,30.48 106.66,33.02 U2.23 | v92.69,12.7 93.96,13.97 v93.96,34.29
  Bottom 0.4: U1.20 143.49,20.32 138.41,15.24 v126.98,15.24 125.71,16.51 v109.2,16.51 | U2.23 96.5,33.02 95.23,34.29 v93.96,34.29 85.07,34.29 83.8,33.02 U3.23 | v92.69,12.7 LED12.A 92.47,11.21 91.42,10.16 X9.4
A12  (via drill 0.5)
  Top 0.4: M1.33 125.71,3.81 v125.71,22.86 | v95.23,12.7 v95.23,22.86
  Bottom 0.4: U3.2 72.37,22.86 73.64,21.59 83.8,21.59 85.07,22.86 U2.2 v95.23,22.86 96.5,21.59 105.39,21.59 106.66,22.86 v125.71,22.86 U1.22 | v95.23,12.7 LED13.A 95.01,11.21 93.96,10.16 X9.5
A13  (via drill 0.5)
  Top 0.4: v97.77,25.4 v97.77,12.7 | M1.32 v124.44,26.67
  Bottom 0.4: U3.26 83.8,25.4 85.07,26.67 95.23,26.67 96.5,25.4 v97.77,25.4 U2.26 105.39,25.4 106.66,26.67 v124.44,26.67 126.98,26.67 128.25,25.4 U1.23 | v97.77,12.7 LED14.A 97.55,11.21 96.5,10.16 X9.6
A14  (via drill 0.5)
  Top 0.4: M1.31 123.17,3.81 v123.17,21.59 123.17,26.67 124.44,27.94 U1.24 130.79,27.94 133.33,30.48 133.33,91.44 132.06,92.71 128.25,92.71 126.98,91.44 U5.13 | v100.31,19.05 v100.31,12.7
  Bottom 0.4: v123.17,21.59 107.93,21.59 105.39,19.05 v100.31,19.05 96.5,19.05 95.23,20.32 U2.1 85.07,20.32 83.8,19.05 67.29,19.05 | v100.31,12.7 LED15.A 100.09,11.21 99.04,10.16 X9.7 | 67.29,19.05 U3.1 | SJ1.1 67.29,16.76 67.29,19.05
A15  (via drill 0.5)
  Top 0.4: M1.30 v121.9,15.24 121.9,29.21 123.17,30.48 U1.25 130.79,30.48 132.06,31.75 132.06,73.66 U5.1
  Bottom 0.4: X9.8 101.58,9.94 LED16.A 102.85,13.97 104.12,15.24 v121.9,15.24 | U5.1 U5.2
BE
  Bottom 0.4: U1.36 128.25,59.69 R5.2 124.76,57.34 JP2.2
BTN1
  Bottom 0.4: R52.1 52.05,31.75 50.78,33.02 X12.8
BTN2
  Bottom 0.4: R50.1 38.08,29.21 39.35,30.48 40.62,30.48 X12.6
BTN3
  Bottom 0.4: X12.4 35.54,30.48 25.7,30.48 R55.1
BTN4
  Bottom 0.4: X12.2 33,33.02 14.27,33.02 R58.1
D0  (via drill 0.5)
  Top 0.4: M1.22 v111.74,44.45 v111.74,54.61 | M2.7 35.54,73.66 U4.33 35.54,52.07 v36.81,50.8 | v40.62,10.16 44.43,10.16 46.97,12.7 49.51,12.7 54.59,17.78 v54.59,50.8
  Bottom 0.4: v111.74,44.45 96.5,44.45 95.23,45.72 U2.11 85.07,45.72 83.8,44.45 73.64,44.45 72.37,45.72 U3.11 62.21,45.72 57.13,50.8 v54.59,50.8 v36.81,50.8 | X10.1 v40.62,10.16 41.67,11.21 LED17.A | R6.2 121.9,50.8 118.09,54.61 v111.74,54.61
D1  (via drill 0.5)
  Top 0.4: M1.23 113.01,3.81 v113.01,46.99 v113.01,52.07 | M2.8 33,73.66 U4.32 33,54.61 v34.27,53.34 | v43.16,8.89 44.43,8.89 46.97,11.43 49.51,11.43 55.86,17.78 v55.86,53.34
  Bottom 0.4: v113.01,46.99 96.5,46.99 95.23,48.26 U2.12 85.07,48.26 83.8,46.99 73.64,46.99 72.37,48.26 U3.12 62.21,48.26 57.13,53.34 v55.86,53.34 v34.27,53.34 | v113.01,52.07 119.36,52.07 123.17,48.26 R7.2 | LED18.A 44.21,11.21 43.16,10.16 v43.16,8.89 X10.2
D2  (via drill 0.5)
  Top 0.4: M1.24 v114.28,46.99 v114.28,49.53 | M2.9 30.46,73.66 U4.31 30.46,57.15 v31.73,55.88 | v57.13,55.88 57.13,17.78 49.51,10.16 48.24,10.16 46.97,8.89 v45.7,8.89
  Bottom 0.4: v114.28,49.53 96.5,49.53 95.23,50.8 U2.13 85.07,50.8 83.8,49.53 73.64,49.53 72.37,50.8 U3.13 62.21,50.8 v57.13,55.88 v31.73,55.88 | R8.2 122.22,46.99 v114.28,46.99 | LED19.A 46.75,11.21 45.7,10.16 v45.7,8.89 X10.3
D3  (via drill 0.5)
  Top 0.4: M1.25 115.55,3.81 v115.55,44.45 v115.55,53.34 | M2.10 27.92,73.66 U4.30 | v58.4,57.15 58.4,17.78 49.51,8.89 v48.24,8.89
  Bottom 0.4: v115.55,53.34 U2.15 96.5,53.34 95.23,54.61 83.8,54.61 82.53,53.34 U3.15 73.64,53.34 72.37,54.61 60.94,54.61 v58.4,57.15 54.59,60.96 29.19,60.96 27.92,59.69 U4.30 | R9.2 122.22,44.45 v115.55,44.45 | LED20.A 49.29,11.21 48.24,10.16 v48.24,8.89 X10.4
D4  (via drill 0.5)
  Top 0.4: M1.26 v116.82,40.64 v116.82,50.8 | M2.11 25.38,73.66 U4.29 | v59.67,54.61 59.67,17.78 v50.78,8.89
  Bottom 0.4: v116.82,50.8 U2.16 102.85,52.07 85.07,52.07 83.8,50.8 U3.16 73.64,50.8 72.37,52.07 62.21,52.07 v59.67,54.61 57.13,57.15 26.65,57.15 U4.29 | v116.82,40.64 R10.2 | LED21.A 51.83,11.21 50.78,10.16 v50.78,8.89 X10.5
D5  (via drill 0.5)
  Top 0.4: M1.27 118.09,3.81 v118.09,38.1 v118.09,48.26 | M2.12 22.84,73.66 U4.28 | v60.94,50.8 60.94,17.78 v53.32,10.16
  Bottom 0.4: v118.09,48.26 U2.17 96.5,48.26 95.23,49.53 85.07,49.53 83.8,48.26 U3.17 73.64,48.26 72.37,49.53 62.21,49.53 v60.94,50.8 57.13,54.61 26.65,54.61 U4.28 | R11.2 v118.09,38.1 | LED22.A 54.37,11.21 v53.32,10.16 X10.6
D6  (via drill 0.5)
  Top 0.4: M1.28 v119.36,35.56 v119.36,45.72 | M2.13 20.3,73.66 U4.27 | v62.21,46.99 62.21,17.78 55.86,11.43 v55.86,10.16
  Bottom 0.4: v119.36,45.72 U2.18 96.5,45.72 95.23,46.99 85.07,46.99 83.8,45.72 U3.18 73.64,45.72 72.37,46.99 v62.21,46.99 57.13,52.07 26.65,52.07 U4.27 | v119.36,35.56 R12.2 | LED23.A 56.91,11.21 v55.86,10.16 X10.7
D7  (via drill 0.5)
  Top 0.4: M1.29 120.63,3.81 v120.63,33.02 v120.63,43.18 | M2.14 19.03,74.93 19.03,59.05 18.39,58.42 U4.26 | v63.48,44.45 63.48,17.78 58.4,12.7 v58.4,10.16
  Bottom 0.4: v120.63,43.18 U2.19 96.5,43.18 95.23,44.45 85.07,44.45 83.8,43.18 U3.19 73.64,43.18 72.37,44.45 v63.48,44.45 62.21,44.45 57.13,49.53 26.65,49.53 U4.26 | v120.63,33.02 R13.2 | LED24.A 59.45,11.21 v58.4,10.16 X10.8
EEPROM_!CS  (via drill 0.5)
  Top 0.4: v97.77,55.88 97.77,46.99 U2.20
  Bottom 0.4: v97.77,55.88 97.77,56.93 LED28.C 97.99,57.37 99.04,58.42 101.58,58.42 SJ2.2
EEPROM_!WE  (via drill 0.5)
  Top 0.4: v126.98,24.13 v126.98,21.59 | M1.39 133.33,3.81 133.33,19.05 v130.79,21.59
  Bottom 0.4: U2.27 105.39,22.86 106.66,24.13 v126.98,24.13 | v126.98,21.59 v130.79,21.59
GND  (via drill 0.5)
  Bottom 0.4: C1.2 153.65,49.21 153.65,46.99 v156.19,44.45 | R53.2 46.65,29.21 v45.7,29.21 | R51.2 32.68,29.21 v31.73,29.21 | R56.2 18.71,29.21 v17.76,29.21 | R59.2 4.74,29.21 v3.79,29.21
  other vias: 139.68,66.04 139.68,60.96 132.06,12.7 110.47,11.43 146.03,78.74 137.14,78.74 128.25,78.74 121.9,78.74 107.93,11.43 87.61,78.74 90.15,78.74 85.07,97.79 154.92,93.98 139.68,50.8 121.9,52.07 121.9,48.26 151.11,59.05 156.19,58.42 156.19,33.02 64.75,16.51 60.94,2.54 105.39,2.54 38.08,2.54 38.71,9.53 61.57,9.53 66.02,78.74 55.86,78.74 43.16,78.74 17.76,78.74 35.54,46.99 10.14,46.99 5.06,54.61
  pour Top: 162.54,101.6 -2.56,101.6 -2.56,-2.54 162.54,-2.54
  pour Bottom: 161.27,100.33 -3.83,100.33 -3.83,-3.81 161.27,-3.81
HALT_BTN  (via drill 0.5)
  Top 0.4: v110.47,8.89 107.93,8.89 106.66,7.62 27.92,7.62 25.38,10.16 13.11,10.16 X7.1
  Bottom 0.4: X7.2 X7.1 | M1.40 134.6,6.35 132.06,8.89 v110.47,8.89
HALT_LED  (via drill 0.5)
  Top 0.4: v110.47,7.62 107.93,7.62 106.66,6.35 17.76,6.35 v15.22,8.89
  Bottom 0.4: M1.41 133.33,3.81 133.33,6.35 132.06,7.62 v110.47,7.62 | v15.22,8.89 15.22,10.16 14.17,11.21 LED34.A
IRQB  (via drill 0.5)
  Top 0.4: M1.A13 153.65,12.7 149.84,16.51 149.84,57.15 146.03,60.96 U1.4 | v49.51,64.77 49.51,17.78 46.97,15.24 39.35,15.24 v33,8.89
  Bottom 0.4: R2.2 U1.4 143.49,60.96 137.14,54.61 121.9,54.61 113.01,63.5 88.88,63.5 82.53,69.85 74.91,69.85 69.83,64.77 v49.51,64.77 10.9,64.77 JP3.2 | LED27.C 34.05,11.21 33,10.16 v33,8.89 X5.2
LCD_CS  (via drill 0.5)
  Top 0.4: M2.6 v60.94,92.71
  Bottom 0.4: SJ7.2 91.42,95.25 88.88,95.25 87.83,94.2 LED31.A 86.56,92.71 v60.94,92.71
N$1
  Bottom 0.4: U1.33 R6.1
N$2
  Bottom 0.4: U1.32 R7.1
N$3
  Bottom 0.4: U1.31 R8.1
N$4
  Bottom 0.4: R9.1 U1.30
N$5
  Bottom 0.4: U1.29 R10.1
N$6
  Bottom 0.4: U1.28 R11.1
N$7
  Bottom 0.4: U1.27 R12.1
N$8
  Bottom 0.4: U1.26 R13.1
N$9
  Bottom 0.4: U5.8 X17.3
N$10
  Bottom 0.4: U5.9 X17.2
N$11  (via drill 0.5)
  Top 0.4: v68.56,35.56 v68.56,17.78
  Bottom 0.4: U3.22 v68.56,35.56 | SJ1.2 v68.56,17.78
N$12  (via drill 0.5)
  Top 0.4: U5.4 120.63,74.93 120.63,60.96 119.36,59.69 v97.77,59.69 | U5.12 U5.3
  Bottom 0.4: U5.3 U5.4 | v97.77,59.69 SJ2.3
N$13  (via drill 0.5)
  Top 0.4: v74.91,74.93 v74.91,59.69
  Bottom 0.4: v74.91,59.69 SJ4.3 | v74.91,74.93 85.07,74.93 86.34,73.66 115.55,73.66 116.82,74.93 U5.6
N$14  (via drill 0.5)
  Top 0.4: v68.56,90.17 59.67,81.28 v59.67,60.96
  Bottom 0.4: v59.67,60.96 SJ3.3 | v68.56,90.17 146.03,90.17 X3.1 U6.15
N$15  (via drill 0.5)
  Top 0.4: U6.6 138.41,77.47 v138.41,93.34
  Bottom 0.4: v138.41,93.34 JP4.2
N$16  (via drill 0.5)
  Top 0.4: U5.11 121.9,91.44 124.44,93.98 137.14,93.98 137.77,94.61 143.49,94.61 v144.76,95.89
  Bottom 0.4: v144.76,95.89 144.63,96.01 JP5.1
N$17  (via drill 0.5)
  Top 0.4: U6.5 140.95,77.47 v140.95,93.34
  Bottom 0.4: v140.95,93.34 JP6.2
N$18  (via drill 0.5)
  Top 0.4: v105.39,88.9 102.85,86.36 102.85,77.47 U7.1
  Bottom 0.4: U6.14 X3.2 144.76,88.9 v105.39,88.9 | U7.1 U7.2
N$19
  Bottom 0.4: U7.3 U7.4
N$20
  Top 0.4: U7.9 U7.6
  Bottom 0.4: U7.9 U7.10
N$21  (via drill 0.5)
  Top 0.4: U7.8 86.34,95.25 v87.61,96.52
  Bottom 0.4: SJ7.3 v87.61,96.52
N$22
  Bottom 0.4: LED1.C R21.1
N$23
  Bottom 0.4: LED2.C R22.1
N$24
  Bottom 0.4: LED3.C R23.1
N$25
  Bottom 0.4: LED4.C R24.1
N$26
  Bottom 0.4: LED5.C R25.1
N$27
  Bottom 0.4: LED6.C R26.1
N$28
  Bottom 0.4: LED7.C R27.1
N$29
  Bottom 0.4: LED8.C R28.1
N$30
  Bottom 0.4: LED9.C R29.1
N$31
  Bottom 0.4: LED10.C R30.1
N$32
  Bottom 0.4: LED11.C R31.1
N$33
  Bottom 0.4: LED12.C R32.1
N$34
  Bottom 0.4: LED13.C R33.1
N$35
  Bottom 0.4: LED14.C R34.1
N$36
  Bottom 0.4: LED15.C R35.1
N$37
  Bottom 0.4: LED16.C R36.1
N$38
  Bottom 0.4: LED17.C R37.1
N$39
  Bottom 0.4: LED18.C R38.1
N$40
  Bottom 0.4: LED19.C R39.1
N$41
  Bottom 0.4: LED20.C R40.1
N$42
  Bottom 0.4: LED21.C R41.1
N$43
  Bottom 0.4: LED22.C R42.1
N$44
  Bottom 0.4: LED23.C R43.1
N$45
  Bottom 0.4: LED24.C R44.1
N$46
  Bottom 0.4: R45.1 LED25.C
N$47
  Bottom 0.4: LED26.C 152.28,7.84 R46.1
N$48
  Bottom 0.4: R47.1 LED27.A
N$49
  Bottom 0.4: R14.1 LED28.A
N$50
  Bottom 0.4: R15.1 LED29.A
N$51
  Bottom 0.4: R16.1 LED30.A
N$52
  Bottom 0.4: U5.10 X17.1
N$53  (via drill 0.5)
  Top 0.4: v143.49,93.34 143.49,77.47 U6.4
  Bottom 0.4: JP5.2 v143.49,93.34
N$54
  Bottom 0.4: LED39.C 144.86,7.84 R60.1
N$55
  Bottom 0.4: JP3.1 5.06,60.45 U4.21
N$56
  Bottom 0.4: U6.12 X3.4
N$57
  Bottom 0.4: U6.11 X3.5
N$58
  Bottom 0.4: U6.13 X3.3
N$59
  Bottom 0.4: U6.10 X3.6
N$60
  Bottom 0.4: U6.9 X3.7
N$61
  Bottom 0.4: LED31.C R17.1
N$62
  Bottom 0.4: U7.11 X4.1
N$63
  Bottom 0.4: U7.12 X4.2
N$64
  Bottom 0.4: U7.13 X4.3
N$65
  Bottom 0.4: R18.1 LED32.A
N$66
  Bottom 0.4: LED33.C R19.1
N$67
  Bottom 0.4: LED34.C R20.1
N$68
  Bottom 0.4: U4.2 X11.2
N$69
  Bottom 0.4: U4.3 X11.3
N$70
  Bottom 0.4: U4.4 X11.4
N$71
  Bottom 0.4: U4.5 X11.5
N$72
  Bottom 0.4: U4.6 X11.6
N$73
  Bottom 0.4: U4.7 X11.7
N$74
  Bottom 0.4: U4.8 X11.8
N$75
  Bottom 0.4: U4.9 X11.9
N$76
  Bottom 0.4: U4.10 X8.1
N$77
  Bottom 0.4: U4.11 X8.2
N$78
  Bottom 0.4: U4.12 X8.3
N$79
  Bottom 0.4: U4.13 X8.4
N$80
  Bottom 0.4: U4.14 X8.5
N$81
  Bottom 0.4: U4.15 X8.6
N$82
  Bottom 0.4: U4.16 X8.7
N$83
  Bottom 0.4: U4.17 X8.8
N$84
  Bottom 0.4: X13.2 X13.1 53.32,24.41 53.32,25.72 | R52.2 53.32,25.72 | 53.32,25.72 R48.2
N$85
  Bottom 0.4: LED35.C 47.07,26.89 R53.1
N$86
  Bottom 0.4: R49.2 40.62,26.95 39.39,25.72 39.35,25.72 | R50.2 39.35,25.72 | 39.35,25.72 39.35,24.41 X14.1 X14.2
N$87
  Bottom 0.4: R51.1 33.1,26.89 LED36.C
N$88
  Bottom 0.4: R54.2 25.38,25.72 | 25.38,25.72 25.38,24.41 X15.1 X15.2 | 25.38,25.72 R55.2
N$89
  Bottom 0.4: R56.1 19.13,26.89 LED37.C
N$90
  Bottom 0.4: R57.2 11.41,25.72 | 11.41,25.72 11.41,24.41 X16.1 X16.2 | 11.41,25.72 R58.2
N$91
  Bottom 0.4: JP7.1 12.68,60.45 U4.24
N$92  (via drill 0.5)
  Top 0.4: v69.83,91.44 68.56,92.71 M2.3
  Bottom 0.4: R61.2 98.41,96.52 93.33,91.44 v69.83,91.44
N$95
  Bottom 0.4: LED38.C 5.16,26.89 R59.1
NMIB
  Top 0.4: M1.A14 153.65,10.16 148.57,15.24 148.57,53.34 146.03,55.88 U1.6
  Bottom 0.4: R3.2 U1.6
PHI2  (via drill 0.5)
  Top 0.4: U4.25 17.76,60.96 v17.76,66.04 | M1.A11 153.65,17.78 152.38,19.05 v152.38,62.23 | U5.5 v119.36,62.23 | v27.92,8.89 36.81,17.78 43.16,17.78 44.43,19.05 v44.43,66.04
  Bottom 0.4: v152.38,62.23 130.79,62.23 U1.37 128.25,62.23 v119.36,62.23 118.09,62.23 115.55,64.77 88.88,64.77 82.53,71.12 74.91,71.12 69.83,66.04 v44.43,66.04 v17.76,66.04 | U5.5 119.36,77.47 118.09,78.74 92.69,78.74 91.42,77.47 U7.5 | LED33.A 27.92,9.94 v27.92,8.89 X5.4
PIA_!CS
  Bottom 0.4: SJ3.2 63.48,59.69 61.16,59.69 LED30.C 56.08,62.23 11.41,62.23 10.14,60.96 U4.23
RAM_!CS  (via drill 0.5)
  Top 0.4: v74.91,55.88 74.91,46.99 U3.20
  Bottom 0.4: SJ4.2 78.72,58.42 76.4,58.42 LED29.C 74.91,56.93 v74.91,55.88
RDY
  Bottom 0.4: R1.2 150.16,66.04 | 150.16,66.04 150.16,64.96 JP1.2 | U1.2 150.16,66.04
RDY_BE  (via drill 0.5)
  Top 0.4: M1.A9 156.19,22.86 154.92,24.13 v154.92,64.77 v154.92,72.39 | v121.9,57.15 v121.9,73.66
  Bottom 0.4: v154.92,64.77 JP1.1 | JP2.1 v121.9,57.15 | v121.9,73.66 153.65,73.66 v154.92,72.39
RESB  (via drill 0.5)
  Top 0.4: U4.34 38.08,64.77 v41.89,68.58 | M1.A10 154.92,20.32 153.65,21.59 v153.65,72.39 | v46.97,68.58 47,68.55 47,26.64 48.24,25.4 48.24,19.05 45.7,16.51 38.08,16.51 v30.46,8.89
  Bottom 0.4: v153.65,72.39 133.33,72.39 U1.40 R4.2 123.48,69.85 121.58,69.85 119.04,67.31 91.42,67.31 85.07,73.66 72.37,73.66 67.29,68.58 v46.97,68.58 v41.89,68.58 | X5.3 v30.46,8.89 30.46,10.16 31.51,11.21 LED32.C 31.73,12.7 30.46,13.97 26.37,13.97 X6.1 X6.2
RWB  (via drill 0.5)
  Top 0.4: M2.5 63.48,92.71 45.7,74.93 v45.7,63.5 | U3.27 78.72,25.4 78.72,31.75 73.64,36.83 v73.64,67.31 | M1.A12 153.65,15.24 151.11,17.78 v151.11,57.15 | v35.54,8.89 40.62,13.97 48.24,13.97 50.78,16.51 50.78,25.4 52.05,26.67 v52.05,63.5
  Bottom 0.4: U4.22 8.55,59.37 8.55,60.64 11.41,63.5 v45.7,63.5 v52.05,63.5 69.83,63.5 v73.64,67.31 74.91,68.58 82.53,68.58 88.88,62.23 111.74,62.23 120.63,53.34 U1.34 137.14,53.34 140.95,57.15 v151.11,57.15 | X5.1 v35.54,8.89 35.54,10.16 36.59,11.21 LED25.A
SYNC  (via drill 0.5)
  Top 0.4: M1.A15 153.65,7.62 v149.84,11.43 147.3,13.97 147.3,50.8 U1.7
  Bottom 0.4: v149.84,11.43 LED26.A
ULED1
  Bottom 0.4: LED35.A 49.51,29.21 48.24,30.48 X12.7
ULED2
  Bottom 0.4: LED36.A 37.03,30.48 38.08,30.48 X12.5
ULED3
  Bottom 0.4: LED37.A 24.33,31.75 34.27,31.75 X12.3
ULED4
  Bottom 0.4: X12.1 31.73,34.29 12.9,34.29 LED38.A

## Text on the board
bPlace: 5V | GND | !EN | LCD | ADDRESS DECODING | E3 | !E2 | !E1 | Peripheral Demux: | 4Y | 4A | 4B | 3Y | 3A | 3B | 6 | 5 | 4 | 3 | 2 | 1 | 0 | 74x00 | 74x00 | 74x138 | MICROPROCESSOR | !RES | !VP | PHI2O | RDY | SOB | PHI1 | !IRQ | 5V|CS1 | PERIPHERAL INTERFACE | PHI2 | !IRQ | BE | !ML | RAM | EEPROM | !NMI | 62256 | 28C256 | R!W | SYNC | W65C22 | D0 | VDD | D1 | A0 | D2 | A1 | D3 | A2 | D4 | A3 | 5V | G | B7 | B6 | B5 | B4 | B3 | B2 | B1 | B0 | A7 | A6 | A5 | A4 | A3 | A2 | A1 | A0 | GND | D5 | A4 | D6 | A5 | D4 | B4 | D3 | B3 | D2 | B2 | D1 | B1 | D7 | A6 | A15 | A7 | A14 | A8 | A13 | A9 | A12 | A10 | 4 | 3 | 2 | 1 | VSS | A11 | W65C02 | DATA | ADDRESS | HALT/ / SINGLE STEP | RESET | PHI2 | RESET | IRQ | R!W | 0 | 1 | 2 | 3 | 4 | 5 | 6 | 7 | 0 | 1 | 2 | 3 | 4 | 5 | 6 | 7 | 8 | 9 | 10 | 11 | 12 | 13 | 14 | 15 | PWR | SYNC | V1.0 | RF-6502 | 01-2021 | R. Fromm | GND | 5V